# EAGLE board dspCore_rev1.3 (EAGLE 7.6.0), part 1 of 2
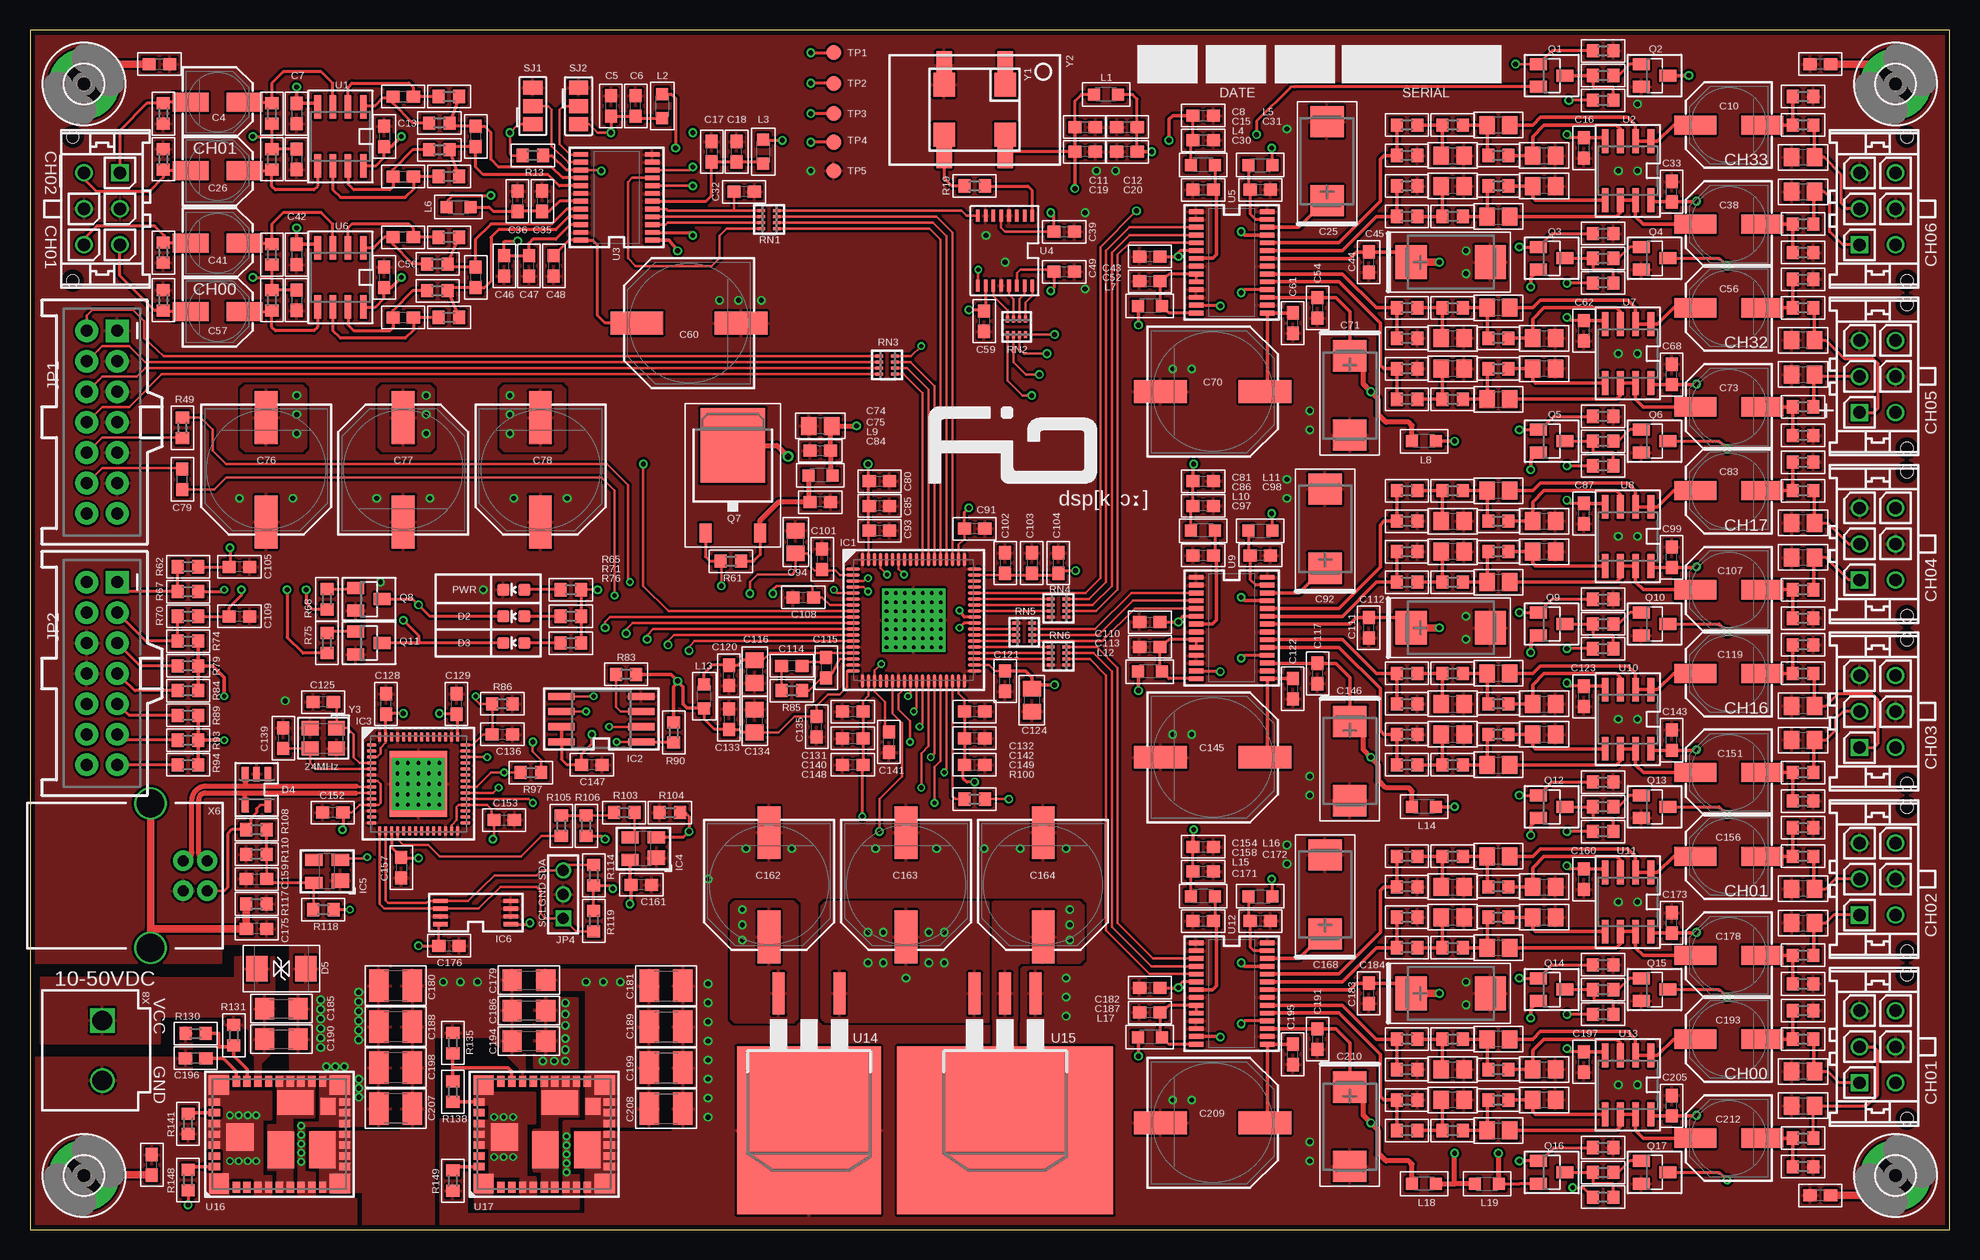
[diagram p0: board, top side]
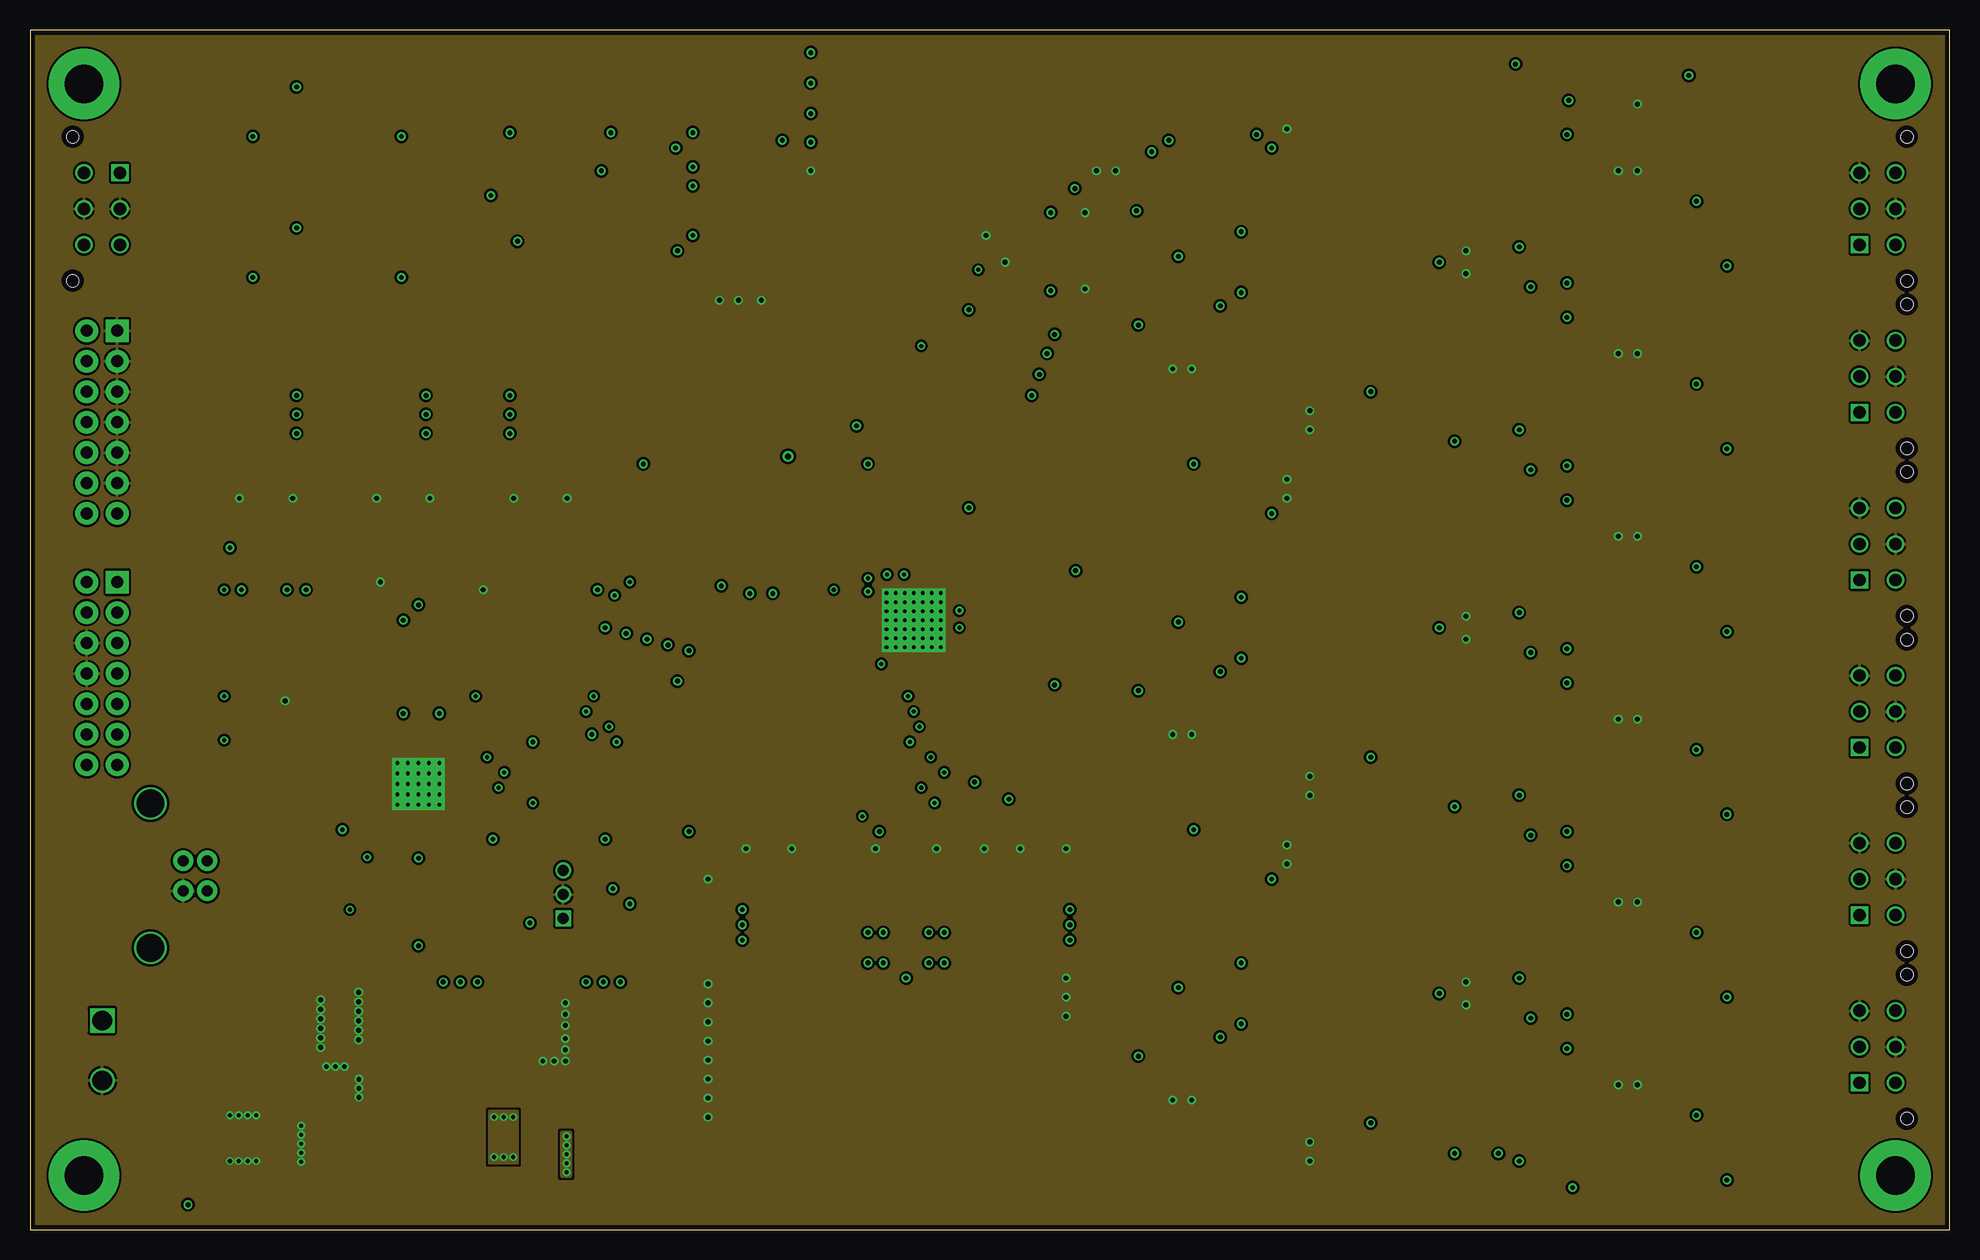
[diagram p1: board, inner layer groundplane]
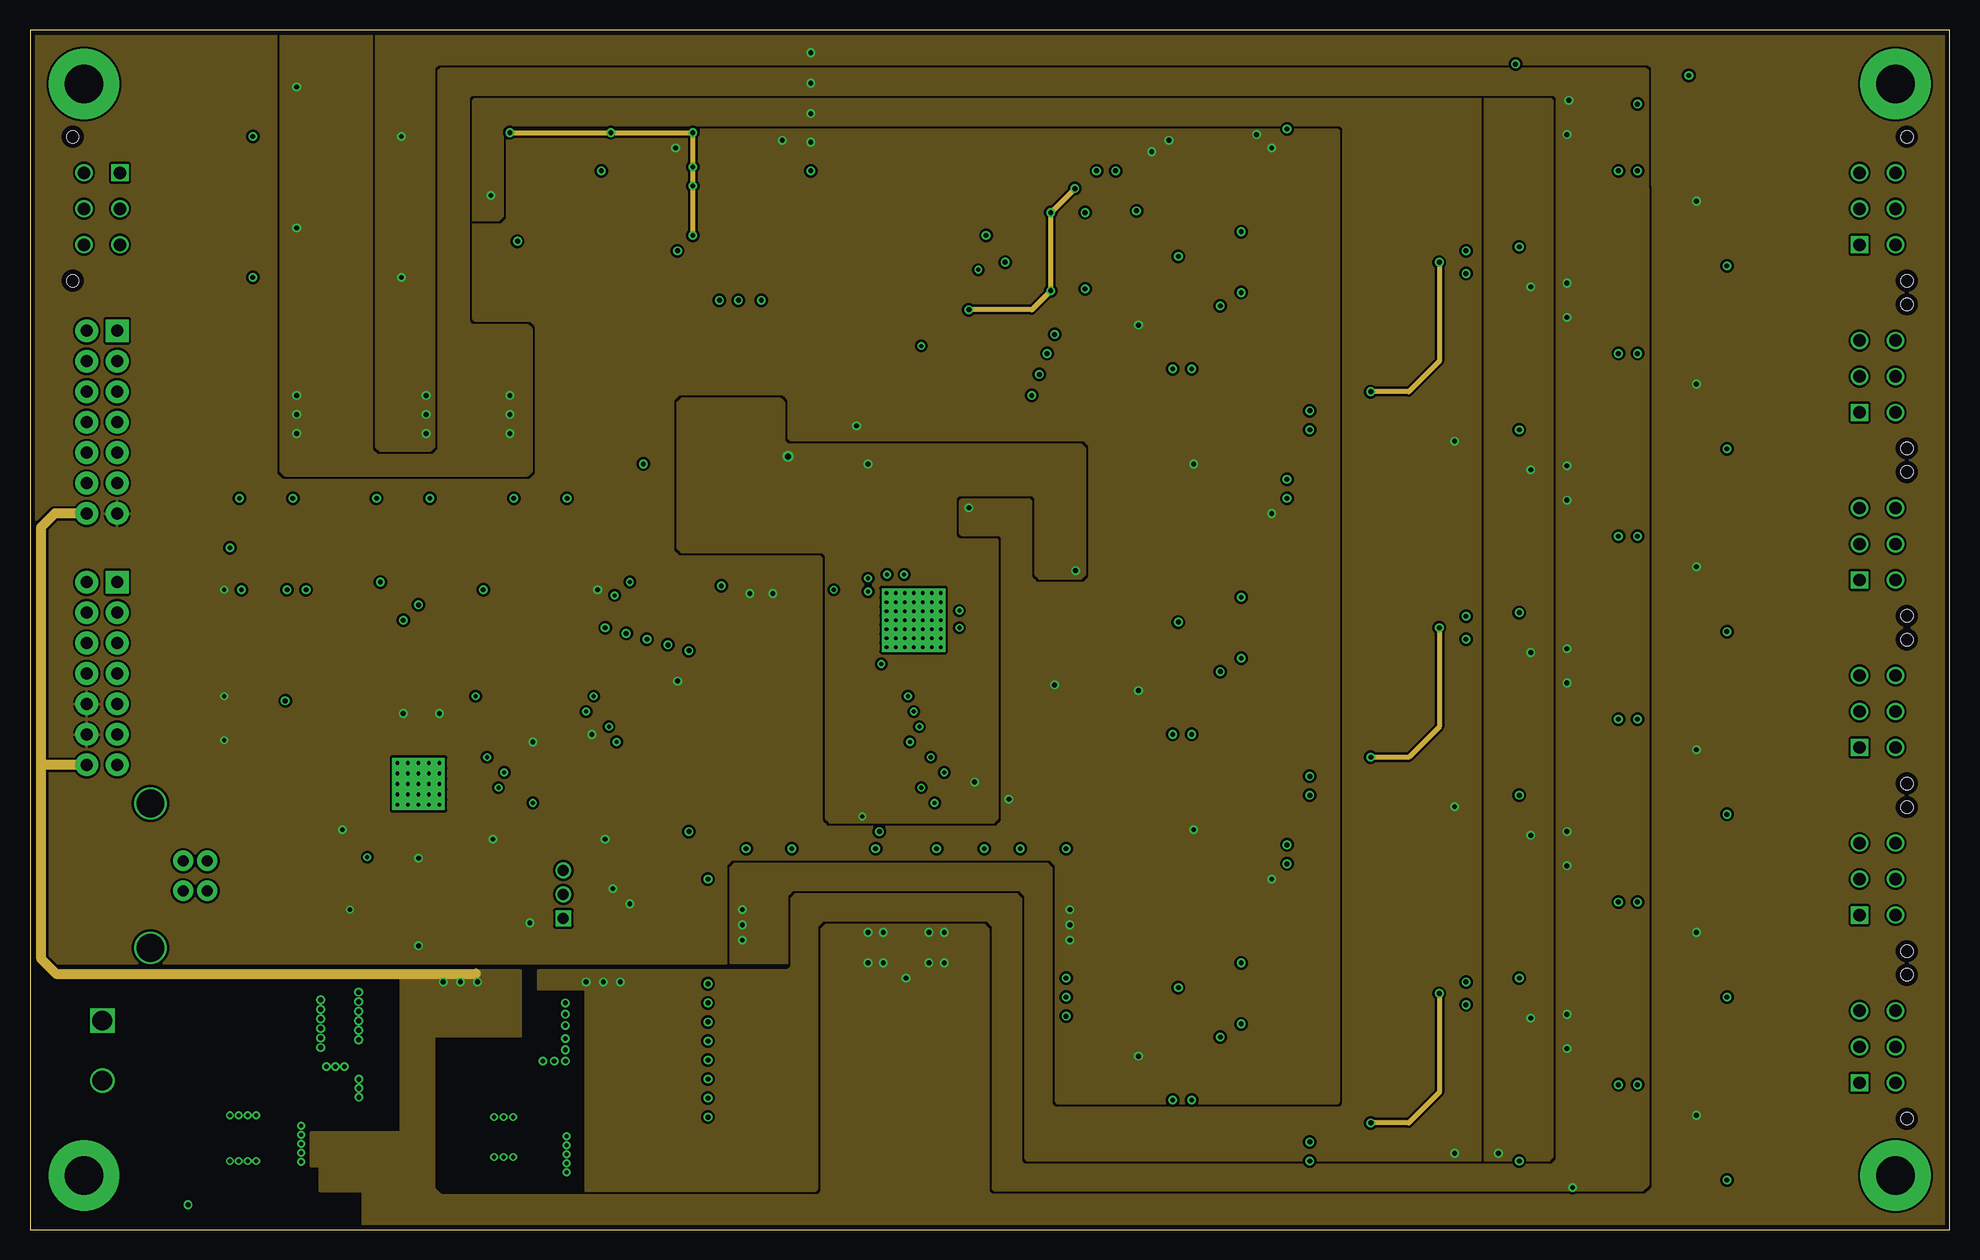
[diagram p2: board, inner layer powerplane]
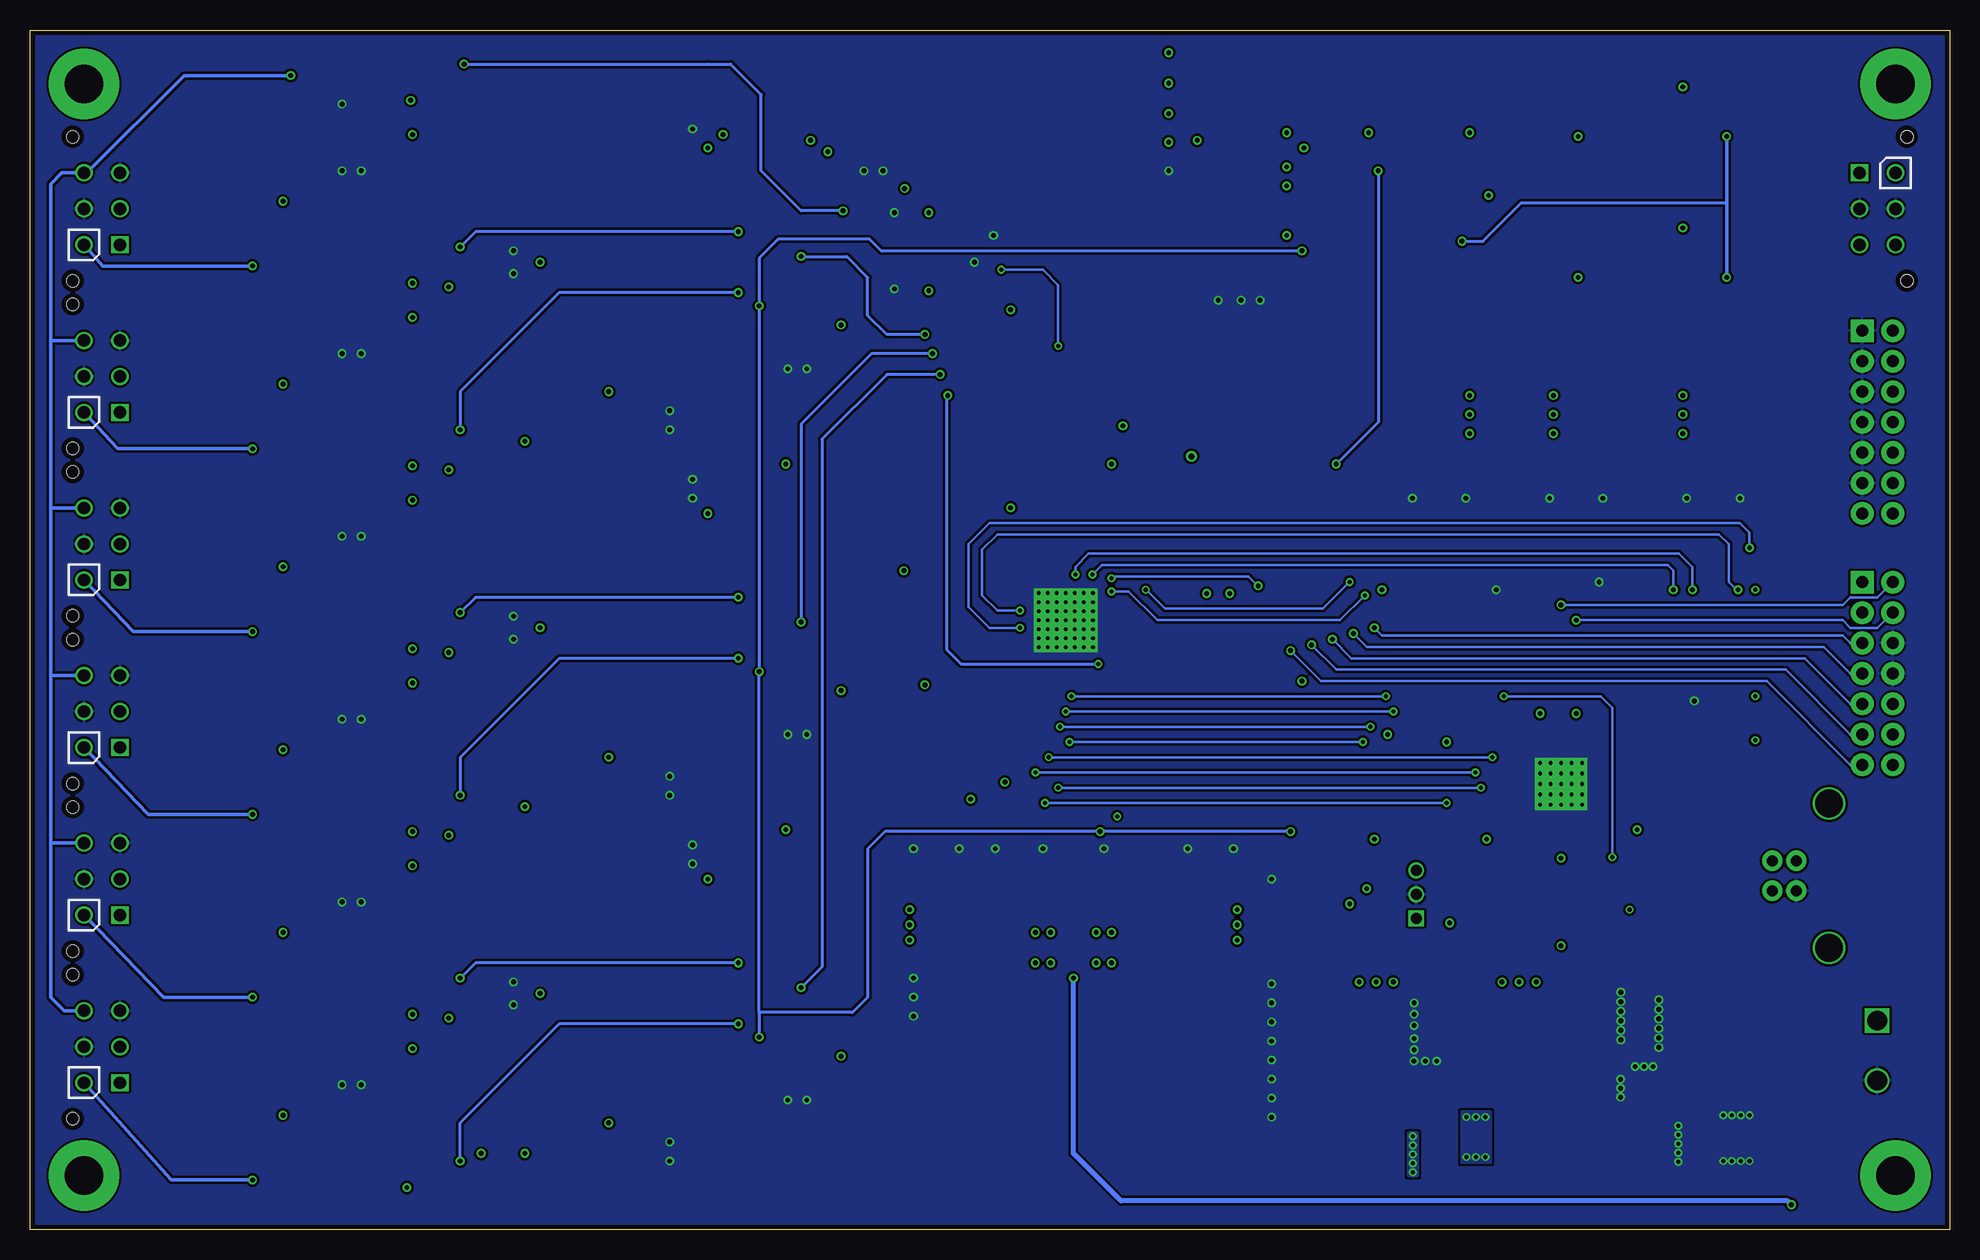
[diagram p3: board, bottom side, seen from below]

Size 160 x 100 mm. Coordinates in mm from the lower left corner, seen from the top.
Outline: 0,0 160,0 160,100 0,100 0,0
Copper layers (1+2*15+16): Top 0.035mm / dielectric 0.38mm / groundplane 0.035mm / dielectric 0.71mm / powerplane 0.035mm / dielectric 0.38mm / Bottom 0.035mm
Design rules "default": minimum track width 0.15mm, minimum drill 0.3mm, track to track 0.15mm, track to pad 0.15mm, pad to pad 0.15mm, via to via 0.15mm, smd to smd 0.15mm, copper to edge 0.4mm, drill to drill 0.2mm, minimum pad ring 0.2mm, minimum via ring 0.15mm, stop-mask expansion 0.075mm, vias tented up to drill 0mil, thermal gap 0.2mm
Net classes: 0 default: clearance 0.203 mm; 1 8V: clearance 0.203 mm; 2 50V: clearance 0.254 mm; 3 Isolate: clearance 0.762 mm; 4 isolate mount: clearance 0.508 mm

## Footprints (pad centres in the part's own frame; a part is rotated, then mirrored left to right if it is on the bottom)
C0603 = smd 1.1 x 1: 1 -0.85,0; 2 0.85,0
PANASONIC_C = smd 3 x 1.6: + 2.25,0; - -2.25,0
C0805 = smd 1.3 x 1.5: 1 -0.95,0; 2 0.95,0
PANASONIC_D = smd 3.5 x 1.6: + 2.8,0; - -2.8,0
CT7343 = smd 2.6 x 2.8: + -3.3,0; - 3.3,0
PANASONIC_G = smd 4.4 x 1.9: + 4.35,0; - -4.35,0
C1206 = smd 1.6 x 1.8: 1 -1.4,0; 2 1.4,0
C1210 = smd 1.6 x 2.7: 1 -1.4,0; 2 1.4,0
LED-0603 = smd 1 x 1: A 0,-0.877; C 0,0.877
SOT23-5L = smd 0.55 x 1.2: 1 -0.95,-1.3; 2 0,-1.3; 3 0.95,-1.3; 4 0.95,1.3; 5 -0.953,1.295
SMBJ = smd 1.78 x 2.16: A 2.04,0; C -2.03,0
3,2-PAD = drill 3.2 pad 5.842: B3,2 0,0
LFCSP-72 = smd 1.1 x 0.28: 1 -5.058,4.25; 2 -5.058,3.75; 3 -5.058,3.25; 4 -5.058,2.75; 5 -5.058,2.25; 6 -5.058,1.75; 7 -5.058,1.25; 8 -5.058,0.75; 9 -5.058,0.25; 10 -5.058,-0.25; 11 -5.058,-0.75; 12 -5.058,-1.25; 13 -5.058,-1.75; 14 -5.058,-2.25; 15 -5.058,-2.75; 16 -5.058,-3.25; 17 -5.058,-3.75; 18 -5.058,-4.25; 37 5.058,-4.25; 38 5.058,-3.75; 39 5.058,-3.25; 40 5.058,-2.75; 41 5.058,-2.25; 42 5.058,-1.75; 43 5.058,-1.25; 44 5.058,-0.75; 45 5.058,-0.25; 46 5.058,0.25; 47 5.058,0.75; 48 5.058,1.25; 49 5.058,1.75; 50 5.058,2.25; 51 5.058,2.75; 52 5.058,3.25; 53 5.058,3.75; 54 5.058,4.25 | smd 0.28 x 1.1: 19 -4.25,-5.058; 20 -3.75,-5.058; 21 -3.25,-5.058; 22 -2.75,-5.058; 23 -2.25,-5.058; 24 -1.75,-5.058; 25 -1.25,-5.058; 26 -0.75,-5.058; 27 -0.25,-5.058; 28 0.25,-5.058; 29 0.75,-5.058; 30 1.25,-5.058; 31 1.75,-5.058; 32 2.25,-5.058; 33 2.75,-5.058; 34 3.25,-5.058; 35 3.75,-5.058; 36 4.25,-5.058; 55 4.25,5.058; 56 3.75,5.058; 57 3.25,5.058; 58 2.75,5.058; 59 2.25,5.058; 60 1.75,5.058; 61 1.25,5.058; 62 0.75,5.058; 63 0.25,5.058; 64 -0.25,5.058; 65 -0.75,5.058; 66 -1.25,5.058; 67 -1.75,5.058; 68 -2.25,5.058; 69 -2.75,5.058; 70 -3.25,5.058; 71 -3.75,5.058; 72 -4.25,5.058 | drill 0.3 pad 0.754 square: P$1 -2.262,-2.262; P$2 -2.262,-1.508; P$3 -2.262,-0.754; P$4 -2.262,0; P$5 -2.262,0.754; P$6 -2.262,1.508; P$7 -2.262,2.262; P$8 -1.508,2.262; P$9 -0.754,2.262; P$10 0,2.262; P$11 0.754,2.262; P$12 1.508,2.262; P$13 2.262,2.262; P$14 2.262,1.508; P$15 2.262,0.754; P$16 1.508,0.754; P$17 1.508,1.508; P$18 0.754,1.508; P$19 0,1.508; P$20 -1.508,1.508; P$21 -0.754,1.508; P$22 -1.508,0.754; P$23 -0.754,0.754; P$24 0,0.754; P$25 0.754,0.754; P$27 2.262,0; P$28 1.508,0; P$29 0.754,0; P$30 0,0; P$31 -0.754,0; P$32 -1.508,0; P$33 -1.508,-0.754; P$34 -0.754,-0.754; P$35 0,-0.754; P$36 0.754,-0.754; P$37 2.262,-0.754; P$38 1.508,-0.754; P$39 2.262,-1.508; P$40 1.508,-1.508; P$41 0.754,-1.508; P$42 -0.754,-1.508; P$43 0,-1.508; P$44 -1.508,-1.508; P$45 -1.508,-2.262; P$46 -0.754,-2.262; P$47 0,-2.262; P$48 0.754,-2.262; P$49 1.508,-2.262; P$50 2.262,-2.262 | smd 5.25 x 5.25: P$26 0,0
SO-08M = smd 0.6 x 2.2: 1 -1.905,-3.33; 2 -0.635,-3.33; 3 0.635,-3.33; 4 1.905,-3.33; 5 1.905,3.33; 6 0.635,3.33; 7 -0.635,3.33; 8 -1.905,3.33
QFN56 = smd 0.8 x 0.28: 1 -3.915,3.25; 2 -3.915,2.75; 3 -3.915,2.25; 4 -3.915,1.75; 5 -3.915,1.25; 6 -3.915,0.75; 7 -3.915,0.25; 8 -3.915,-0.25; 9 -3.915,-0.75; 10 -3.915,-1.25; 11 -3.915,-1.75; 12 -3.915,-2.25; 13 -3.915,-2.75; 14 -3.915,-3.25; 29 3.915,-3.25; 30 3.915,-2.75; 31 3.915,-2.25; 32 3.915,-1.75; 33 3.915,-1.25; 34 3.915,-0.75; 35 3.915,-0.25; 36 3.915,0.25; 37 3.915,0.75; 38 3.915,1.25; 39 3.915,1.75; 40 3.915,2.25; 41 3.915,2.75; 42 3.915,3.25 | smd 0.28 x 0.8: 15 -3.25,-3.915; 16 -2.75,-3.915; 17 -2.25,-3.915; 18 -1.75,-3.915; 19 -1.25,-3.915; 20 -0.75,-3.915; 21 -0.25,-3.915; 22 0.25,-3.915; 23 0.75,-3.915; 24 1.25,-3.915; 25 1.75,-3.915; 26 2.25,-3.915; 27 2.75,-3.915; 28 3.25,-3.915; 43 3.25,3.915; 44 2.75,3.915; 45 2.25,3.915; 46 1.75,3.915; 47 1.25,3.915; 48 0.75,3.915; 49 0.25,3.915; 50 -0.25,3.915; 51 -0.75,3.915; 52 -1.25,3.915; 53 -1.75,3.915; 54 -2.25,3.915; 55 -2.75,3.915; 56 -3.25,3.915 | smd 4.8 x 5.5: EPAD 0,0 | drill 0.3 pad 0.873 square: P$1 -1.746,1.746; P$2 -0.873,1.746; P$3 0,1.746; P$4 0.873,1.746; P$5 1.746,1.746; P$6 0,0.873; P$7 1.746,0; P$8 0.873,0; P$9 -0.873,0; P$10 -1.746,0; P$11 -1.746,0.873; P$12 -0.873,0.873; P$13 0,0; P$14 0.873,0.873; P$15 1.746,0.873; P$16 1.746,-1.746; P$17 0.873,-1.746; P$18 0,-1.746; P$19 -0.873,-0.873; P$20 -1.746,-1.746; P$21 -1.746,-0.873; P$22 -0.873,-1.746; P$23 0,-0.873; P$24 0.873,-0.873; P$25 1.746,-0.873
SOT143 = smd 1.2 x 1.44: 1 -0.75,-1.1 | smd 1 x 1.44: 2 0.95,-1.1; 3 0.95,1.1; 4 -0.95,1.1
TSSOP8 = smd 0.35 x 1.2: 1 -0.975,-2.925; 2 -0.325,-2.925; 3 0.325,-2.925; 4 0.975,-2.925; 5 0.975,2.925; 6 0.325,2.925; 7 -0.325,2.925; 8 -0.975,2.925
2X7-SHROUDED_LOCK = drill 1 pad 1.88 square: 1 -7.62,1.27 | drill 1 pad 1.88: 2 -7.62,-1.27; 3 -5.08,1.27; 4 -5.08,-1.27; 5 -2.54,1.27; 6 -2.54,-1.27; 7 0,1.27; 8 0,-1.27; 9 2.54,1.27; 10 2.54,-1.27; 11 5.08,1.27; 12 5.08,-1.27; 13 7.62,1.27; 14 7.62,-1.27
1X03M = drill 0.914 square: 1 -2,0 | drill 0.914: 2 0,0; 3 2,0
L2012C = smd 1 x 1: 1 -1,0; 2 1,0
SOT-23 = smd 1 x 1.4: 1 -0.95,-1.1; 2 0.95,-1.1; 3 0,1.1
SOT-23' = smd 1 x 1.4: B -0.95,-1.1; C 0,1.1; E 0.95,-1.1
TO252 = smd 1 x 1.6: 1 -2.28,-4.8; 3 2.28,-4.8 | smd 5.4 x 6.2: 2 0,2.5
R0603 = smd 1 x 1.1: 1 -0.85,0; 2 0.85,0
741-8 = smd 0.25 x 0.61: 1 -0.75,-0.65; 2 -0.25,-0.65; 3 0.25,-0.65; 4 0.75,-0.65; 5 0.75,0.65; 6 0.25,0.65; 7 -0.25,0.65; 8 -0.75,0.65
SJ_2 = smd 1.168 x 1.6: 1 -1.524,0; 2 0,0; 3 1.524,0
B1,27 = smd 1.27 x 1.27: TP 0,0
SOIC8 = smd 0.559 x 1.981: 1 -1.905,-2.464; 2 -0.635,-2.464; 3 0.635,-2.464; 4 1.905,-2.464; 5 1.905,2.464; 6 0.635,2.464; 7 -0.635,2.464; 8 -1.905,2.464
TSSOP-24 = smd 0.4 x 1.2: 1 -3.575,-2.97; 2 -2.925,-2.97; 3 -2.275,-2.97; 4 -1.625,-2.97; 5 -0.975,-2.97; 6 -0.325,-2.97; 7 0.325,-2.97; 8 0.975,-2.97; 9 1.625,-2.97; 10 2.275,-2.97; 11 2.925,-2.97; 12 3.575,-2.97; 13 3.575,2.97; 14 2.925,2.97; 15 2.275,2.97; 16 1.625,2.97; 17 0.975,2.97; 18 0.325,2.97; 19 -0.325,2.97; 20 -0.975,2.97; 21 -1.625,2.97; 22 -2.275,2.97; 23 -2.925,2.97; 24 -3.575,2.97
TSSOP16 = smd 0.305 x 0.991: 1 -2.275,-2.918; 2 -1.625,-2.918; 3 -0.975,-2.918; 4 -0.325,-2.918; 5 0.325,-2.918; 6 0.975,-2.918; 7 1.625,-2.918; 8 2.275,-2.918; 9 2.275,2.918; 10 1.625,2.918; 11 0.975,2.918; 12 0.325,2.918; 13 -0.325,2.918; 14 -0.975,2.918; 15 -1.625,2.918; 16 -2.275,2.918
TSSOP-28 = smd 0.4 x 1.2: 1 -4.21,-2.97; 2 -3.56,-2.97; 3 -2.91,-2.97; 4 -2.26,-2.97; 5 -1.61,-2.97; 6 -0.96,-2.97; 7 -0.31,-2.97; 8 0.34,-2.97; 9 0.99,-2.97; 10 1.64,-2.97; 11 2.29,-2.97; 12 2.94,-2.97; 13 3.59,-2.97; 14 4.24,-2.97; 15 4.24,2.97; 16 3.59,2.97; 17 2.94,2.97; 18 2.29,2.97; 19 1.64,2.97; 20 0.99,2.97; 21 0.34,2.97; 22 -0.31,2.97; 23 -0.96,2.97; 24 -1.61,2.97; 25 -2.26,2.97; 26 -2.91,2.97; 27 -3.56,2.97; 28 -4.21,2.97
TO263-2 = smd 1.016 x 3.504: 1 -2.54,-8.89; 3 2.54,-8.89 | smd 12 x 14: 2 0,2.54
TO263-3 = smd 1.016 x 3.504: 1 -2.54,-8.89; 2 0,-8.89; 3 2.54,-8.89 | smd 18 x 14: 4 0,2.54
B1QFN-41 = smd 1.702 x 1.6: 1 -4.1,5.05 | smd 0.94 x 0.61: 2 -4.42,3.6; 3 -4.42,2.7; 4 -4.42,1.8; 5 -4.42,0.9; 6 -4.42,0; 7 -4.42,-0.9; 8 -4.42,-1.8; 9 -4.42,-2.7; 10 -4.42,-3.6; 20 4.42,-3.6; 21 4.42,-2.7; 22 4.42,-1.8; 23 4.42,-0.9; 24 4.42,0; 25 4.42,0.9; 26 4.42,1.8; 27 4.42,2.7; 28 4.42,3.6 | smd 1.6 x 1.702: 11 -4.1,-5.05; 19 4.1,-5.05; 29 4.1,5.05 | smd 0.61 x 0.94: 12 -2.7,-5.425; 13 -1.8,-5.425; 14 -0.9,-5.425; 15 0,-5.425; 16 0.9,-5.425; 17 1.8,-5.425; 18 2.7,-5.425; 30 2.7,5.425; 31 1.8,5.425; 32 0.9,5.425; 33 0,5.425; 34 -0.9,5.425; 35 -1.8,5.425; 36 -2.7,5.425 | smd 2.311 x 2.261: 37 -0.22,3.3 | smd 3.099 x 2.21: 38 -1.3,-0.11; 39 -1.3,-3.59 | smd 1.397 x 1.245: 40 2.33,-4.06 | smd 2.032 x 3.048: 41 2.65,-1.32
B1QFN-41' = smd 1.6 x 1.702: 1 -4.1,5.05; 11 -4.1,-5.05; 19 4.1,-5.05; 29 4.1,5.05 | smd 0.94 x 0.61: 2 -4.42,3.6; 3 -4.42,2.7; 4 -4.42,1.8; 5 -4.42,0.9; 6 -4.42,0; 7 -4.42,-0.9; 8 -4.42,-1.8; 9 -4.42,-2.7; 10 -4.42,-3.6; 20 4.42,-3.6; 21 4.42,-2.7; 22 4.42,-1.8; 23 4.42,-0.9; 24 4.42,0; 25 4.42,0.9; 26 4.42,1.8; 27 4.42,2.7; 28 4.42,3.6 | smd 0.61 x 0.94: 12 -2.7,-5.425; 13 -1.8,-5.425; 14 -0.9,-5.425; 15 0,-5.425; 16 0.9,-5.425; 17 1.8,-5.425; 18 2.7,-5.425; 30 2.7,5.425; 31 1.8,5.425; 32 0.9,5.425; 33 0,5.425; 34 -0.9,5.425; 35 -1.8,5.425; 36 -2.7,5.425 | smd 2.311 x 2.261: 37 -0.22,3.3 | smd 3.099 x 2.21: 38 -1.3,-0.11; 39 -1.3,-3.59 | smd 1.397 x 1.245: 40 2.33,-4.06 | smd 2.032 x 3.048: 41 2.65,-1.32
43045-0612 = drill 1.02 square: P$1 3,-1.5 | drill 1.02: P$2 0,-1.5; P$3 -3,-1.5; P$4 3,1.5; P$5 0,1.5; P$6 -3,1.5 | hole 1.02: 6,2.44; -6,2.44
USB-B-H = drill 0.92 pad 1.676: D+ 0,1.25; D- 2,1.25; GND 0,-1.25; VBUS 2,-1.25 | drill 2.3: S1 -2.71,-6.02; S2 -2.71,6.02
B02P-NV = drill 1.65 square: 1 -2.5,0 | drill 1.65: 2 2.5,0
CRYSTAL-SMD-7X5 = smd 1.8 x 2: 1 -2.54,-2.108; 2 2.54,-2.108; 3 2.54,2.092; 4 -2.54,2.092
CRYSTAL-SMD-9X14 = smd 1.3 x 2.3: 1 -2.54,-3.714; 2 2.54,-3.714; 3 2.54,3.714; 4 -2.54,3.714
3.2X2.5MM = smd 1.4 x 1.2: 1 -1.1,-0.85; 2 1.1,-0.85; 3 1.1,0.85; 4 -1.1,0.85

## Placement (x,y rotation side)
C1  0.01u  [C0603]  10.79,97.16 0 top
C2  0.01u  [C0603]  149.22,97.16 180 top
C3  470p  [C0603]  31.11,94.46 0 top
C4  10u  [PANASONIC_C]  15.64,93.98 0 top
C5  0.01u  [C0603]  48.42,93.66 270 top
C6  1u  [C0603]  50.48,93.66 90 top
C7  0.10u  [C0603]  22.23,93.03 270 top
C8  1u  [C0603]  97.79,92.87 0 top
C9  0.018u  [C0805]  122.4,92.08 180 top
C10  47u  [PANASONIC_D]  141.6,92.08 180 top
C11  0.10u  [C0603]  87.95,91.92 0 top
C12  0.10u  [C0603]  91.44,91.92 0 top
C13  0.10u  [C0603]  29.53,91.12 270 top
C14  2700p  [C0603]  37.15,91.12 270 top
C15  0.10u  [C0603]  97.79,90.81 180 top
C16  0.10u  [C0603]  129.54,90.17 90 top
C17  0.01u  [C0603]  56.83,89.85 270 top
C18  1u  [C0603]  58.9,89.85 90 top
C19  0.01u  [C0603]  87.95,89.85 180 top
C20  1u  [C0603]  91.44,89.85 180 top
C21  0.015u  [C0805]  118.59,89.53 0 top
C22  2200p  [C0805]  126.21,89.53 0 top
C23  6800p  [C0805]  147.8,89.38 180 top
C24  0.01u  [C0603]  22.23,89.22 270 top
C25  33u  [CT7343]  108.11,89.06 90 top
C26  10u  [PANASONIC_C]  15.64,88.27 0 top
C27  470p  [C0603]  31.11,87.79 0 top
C28  0.015u  [C0805]  118.59,87 180 top
C29  2200p  [C0805]  126.21,87 180 top
C30  0.01u  [C0603]  97.79,86.68 0 top
C31  0.01u  [C0603]  102.55,86.68 180 top
C32  15p  [C0603]  59.53,86.52 180 top
C33  0.10u  [C0603]  136.84,86.52 90 top
C34  6800p  [C0805]  147.8,86.52 0 top
C35  0.01u  [C0603]  42.7,85.73 270 top
C36  1u  [C0603]  40.64,85.72 270 top
C37  0.018u  [C0805]  122.4,84.45 0 top
C38  47u  [PANASONIC_D]  141.6,83.82 180 top
C39  1u  [C0603]  86.2,83.19 0 top
C40  470p  [C0603]  31.11,82.71 180 top
C41  10u  [PANASONIC_C]  15.64,82.23 0 top
C42  0.10u  [C0603]  22.23,81.28 270 top
C43  15p  [C0603]  93.34,81.12 0 top
C44  0.01u  [C0603]  111.6,80.64 90 top
C45  33u  [CT7343]  118.43,80.64 0 top
C46  1u  [C0603]  39.53,80.33 90 top
C47  0.01u  [C0603]  41.59,80.33 90 top
C48  0.01u  [C0603]  43.66,80.33 270 top
C49  1u  [C0603]  86.2,79.85 0 top
C50  0.10u  [C0603]  29.53,79.38 270 top
C51  2700p  [C0603]  37.15,79.38 270 top
C52  0.01u  [C0603]  93.34,79.06 0 top
C53  0.01u  [C0603]  22.23,77.47 270 top
C54  0.01u  [C0603]  107.31,76.83 270 top
C55  0.018u  [C0805]  122.4,76.83 180 top
C56  47u  [PANASONIC_D]  141.6,76.83 180 top
C57  10u  [PANASONIC_C]  15.64,76.52 0 top
C58  470p  [C0603]  31.11,76.04 0 top
C59  1u  [C0603]  79.53,75.72 270 top
C60  100u  [PANASONIC_G]  54.93,75.56 180 top
C61  0.01u  [C0603]  105.25,75.56 90 top
C62  0.10u  [C0603]  129.54,74.93 90 top
C63  0.015u  [C0805]  118.59,74.3 0 top
C64  2200p  [C0805]  126.21,74.3 0 top
C65  6800p  [C0805]  147.8,74.14 180 top
C66  0.015u  [C0805]  118.59,71.75 180 top
C67  2200p  [C0805]  126.21,71.75 180 top
C68  0.10u  [C0603]  136.84,71.28 90 top
C69  6800p  [C0805]  147.8,71.28 0 top
C70  100u  [PANASONIC_G]  98.58,69.85 0 top
C71  33u  [CT7343]  110.01,69.53 270 top
C72  0.018u  [C0805]  122.4,69.22 0 top
C73  47u  [PANASONIC_D]  141.6,68.58 180 top
C74  10u  [C0805]  65.88,66.99 180 top
C75  0.10u  [C0603]  65.88,64.93 0 top
C76  100u  [PANASONIC_G]  19.69,63.34 270 top
C77  100u  [PANASONIC_G]  31.11,63.34 90 top
C78  100u  [PANASONIC_G]  42.55,63.34 270 top
C79  0.01u  [C0603]  12.7,62.55 90 top
C80  1u  [C0603]  70.8,62.39 0 top
C81  1u  [C0603]  97.79,62.39 0 top
C82  0.018u  [C0805]  122.4,61.59 180 top
C83  47u  [PANASONIC_D]  141.6,61.59 180 top
C84  0.10u  [C0603]  65.88,60.64 180 top
C85  0.10u  [C0603]  70.8,60.33 180 top
C86  0.10u  [C0603]  97.79,60.33 180 top
C87  0.10u  [C0603]  129.54,59.69 90 top
C88  0.015u  [C0805]  118.59,59.05 0 top
C89  2200p  [C0805]  126.21,59.05 0 top
C90  6800p  [C0805]  147.8,58.9 180 top
C91  0.10u  [C0603]  78.74,58.42 180 top
C92  33u  [CT7343]  107.95,58.42 90 top
C93  0.01u  [C0603]  70.8,58.26 180 top
C94  10u  [C0805]  63.82,57.31 90 top
C95  0.015u  [C0805]  118.59,56.52 180 top
C96  2200p  [C0805]  126.21,56.52 180 top
C97  0.01u  [C0603]  97.79,56.2 0 top
C98  0.01u  [C0603]  102.55,56.2 180 top
C99  0.10u  [C0603]  136.84,56.04 90 top
C100  6800p  [C0805]  147.8,56.04 0 top
C101  0.10u  [C0603]  66.04,55.88 270 top
C102  0.01u  [C0603]  81.28,55.56 270 top
C103  0.10u  [C0603]  83.5,55.56 270 top
C104  1u  [C0603]  85.72,55.56 90 top
C105  0.01u  [C0603]  17.46,55.24 180 top
C106  0.018u  [C0805]  122.4,53.98 0 top
C107  47u  [PANASONIC_D]  141.6,53.34 180 top
C108  0.10u  [C0603]  64.45,52.7 0 top
C109  0.01u  [C0603]  17.46,51.12 180 top
C110  15p  [C0603]  93.34,50.64 0 top
C111  0.01u  [C0603]  111.6,50.16 90 top
C112  33u  [CT7343]  118.43,50.16 0 top
C113  0.01u  [C0603]  93.34,48.58 0 top
C114  5600p  [C0603]  63.5,46.99 180 top
C115  150p  [C0603]  66.36,46.83 270 top
C116  10u  [C0805]  60.4,46.51 270 top
C117  0.01u  [C0603]  107.31,46.35 270 top
C118  0.018u  [C0805]  122.4,46.35 180 top
C119  47u  [PANASONIC_D]  141.6,46.35 180 top
C120  0.10u  [C0603]  58.26,46.2 90 top
C121  0.10u  [C0603]  81.28,45.72 90 top
C122  0.01u  [C0603]  105.25,45.09 90 top
C123  0.10u  [C0603]  129.54,44.45 90 top
C124  10u  [C0805]  83.5,44.13 270 top
C125  15p  [C0603]  24.45,43.97 180 top
C126  0.015u  [C0805]  118.59,43.81 0 top
C127  2200p  [C0805]  126.21,43.81 0 top
C128  0.10u  [C0603]  29.69,43.81 90 top
C129  0.10u  [C0603]  35.56,43.81 90 top
C130  6800p  [C0805]  147.8,43.66 180 top
C131  0.01u  [C0603]  68.58,43.18 0 top
C132  0.01u  [C0603]  78.74,43.18 180 top
C133  0.10u  [C0603]  58.26,42.55 270 top
C134  10u  [C0805]  60.4,42.39 90 top
C135  0.10u  [C0603]  65.56,41.91 90 top
C136  0.10u  [C0603]  39.37,41.27 180 top
C137  0.015u  [C0805]  118.59,41.27 180 top
C138  2200p  [C0805]  126.21,41.27 180 top
C139  15p  [C0603]  21.11,40.96 270 top
C140  0.10u  [C0603]  68.58,40.96 0 top
C141  15p  [C0603]  71.6,40.64 90 top
C142  0.10u  [C0603]  78.74,40.96 180 top
C143  0.10u  [C0603]  136.84,40.8 90 top
C144  6800p  [C0805]  147.8,40.8 0 top
C145  100u  [PANASONIC_G]  98.58,39.37 0 top
C146  33u  [CT7343]  110.01,39.05 270 top
C147  0.10u  [C0603]  46.83,38.73 180 top
C148  1u  [C0603]  68.58,38.73 180 top
C149  1u  [C0603]  78.74,38.73 0 top
C150  0.018u  [C0805]  122.4,38.73 0 top
C151  47u  [PANASONIC_D]  141.6,38.1 180 top
C152  0.10u  [C0603]  25.24,34.77 180 top
C153  0.10u  [C0603]  39.53,34.13 0 top
C154  1u  [C0603]  97.79,31.91 0 top
C155  0.018u  [C0805]  122.4,31.11 180 top
C156  47u  [PANASONIC_D]  141.61,31.11 180 top
C157  0.10u  [C0603]  30.96,30.16 270 top
C158  0.10u  [C0603]  97.79,29.84 180 top
C159  0.10u  [C0603]  18.89,29.21 0 top
C160  0.10u  [C0603]  129.54,29.21 90 top
C161  0.10u  [C0603]  50.96,28.73 180 top
C162  100u  [PANASONIC_G]  61.59,28.73 270 top
C163  100u  [PANASONIC_G]  73.03,28.73 270 top
C164  100u  [PANASONIC_G]  84.45,28.73 270 top
C165  0.015u  [C0805]  118.59,28.57 0 top
C166  2200p  [C0805]  126.21,28.57 0 top
C167  6800p  [C0805]  147.8,28.42 180 top
C168  33u  [CT7343]  107.95,27.94 90 top
C169  0.015u  [C0805]  118.59,26.04 180 top
C170  2200p  [C0805]  126.21,26.04 180 top
C171  0.01u  [C0603]  97.79,25.72 0 top
C172  0.01u  [C0603]  102.55,25.72 180 top
C173  0.10u  [C0603]  136.84,25.56 90 top
C174  6800p  [C0805]  147.8,25.56 0 top
C175  0.10u  [C0603]  18.89,25.08 180 top
C176  0.10u  [C0603]  34.92,23.65 0 top
C177  0.018u  [C0805]  122.4,23.5 0 top
C178  47u  [PANASONIC_D]  141.6,22.86 180 top
C179  4.7u  [C1206]  41.59,20.8 0 top
C180  22u  [C1210]  30.48,20.32 180 top
C181  22u  [C1210]  53.02,20.32 0 top
C182  15p  [C0603]  93.34,20.16 0 top
C183  0.01u  [C0603]  111.6,19.68 90 top
C184  33u  [CT7343]  118.43,19.68 0 top
C185  4.7u  [C1206]  20.95,18.41 0 top
C186  4.7u  [C1206]  41.59,18.26 0 top
C187  0.01u  [C0603]  93.34,18.1 0 top
C188  22u  [C1210]  30.48,16.91 180 top
C189  22u  [C1210]  53.02,16.91 0 top
C190  4.7u  [C1206]  20.95,15.88 0 top
C191  0.01u  [C0603]  107.31,15.88 270 top
C192  0.018u  [C0805]  122.4,15.88 180 top
C193  47u  [PANASONIC_D]  141.6,15.88 180 top
C194  4.7u  [C1206]  41.59,15.72 0 top
C195  0.01u  [C0603]  105.25,14.61 90 top
C196  0.22u  [C0603]  13.81,14.29 180 top
C197  0.10u  [C0603]  129.54,13.97 90 top
C198  22u  [C1210]  30.48,13.49 180 top
C199  22u  [C1210]  53.02,13.49 0 top
C200  0.015u  [C0805]  118.59,13.34 0 top
C201  2200p  [C0805]  126.21,13.34 0 top
C202  6800p  [C0805]  147.8,13.18 180 top
C203  0.015u  [C0805]  118.59,10.79 180 top
C204  2200p  [C0805]  126.21,10.79 180 top
C205  0.10u  [C0603]  136.84,10.32 90 top
C206  6800p  [C0805]  147.8,10.32 0 top
C207  22u  [C1210]  30.48,10.08 180 top
C208  22u  [C1210]  53.02,10.08 0 top
C209  100u  [PANASONIC_G]  98.58,8.89 0 top
C210  33u  [CT7343]  110.01,8.57 270 top
C211  0.018u  [C0805]  122.4,8.26 0 top
C212  47u  [PANASONIC_D]  141.6,7.62 180 top
C213  0.01u  [C0603]  10.16,5.4 90 top
C214  0.01u  [C0603]  149.22,2.85 180 top
D1  GREEN  [LED-0603]  40.32,53.34 90 top
D2  GREEN  [LED-0603]  40.32,51.12 90 top
D3  GREEN  [LED-0603]  40.32,48.9 90 top
D4  WE-TVS_824011  [SOT23-5L]  18.89,36.67 180 top
D5  SMBJ51CA  [SMBJ]  20.95,21.75 0 top
H1  DNP  [3,2-PAD]  4.5,95.5 0 top
H2  DNP  [3,2-PAD]  155.5,95.5 0 top
H3  DNP  [3,2-PAD]  4.5,4.5 180 top
H4  DNP  [3,2-PAD]  155.5,4.5 0 top
IC1  ADAU1452  [LFCSP-72]  73.66,50.8 0 top
IC2  25AA1024  [SO-08M]  47.62,42.55 90 top
IC3  CY7C68013A-56LTXC  [QFN56]  32.38,37.15 0 top
IC4  ADM811  [SOT143]  51.12,31.75 90 top
IC5  ADM811  [SOT143]  24.77,29.84 90 top
IC6  24AA256ST  [TSSOP8]  37.15,26.43 90 top
JP1  M07X2  [2X7-SHROUDED_LOCK]  6,67.31 270 top
JP2  M07X2  [2X7-SHROUDED_LOCK]  6,46.35 270 top
JP4  DNP  [1X03M]  44.45,27.94 90 top
L1  600R  [L2012C]  89.69,94.61 180 top
L2  600R  [L2012C]  52.7,93.66 270 top
L3  600R  [L2012C]  61.12,89.85 270 top
L4  600R  [L2012C]  97.79,88.74 180 top
L5  600R  [L2012C]  102.55,88.74 0 top
L6  600R  [L2012C]  35.72,85.25 0 top
L7  600R  [L2012C]  93.34,76.99 180 top
L8  600R  [L2012C]  116.2,65.72 180 top
L9  600R  [L2012C]  65.88,62.87 180 top
L10  600R  [L2012C]  97.79,58.26 180 top
L11  600R  [L2012C]  102.55,58.26 0 top
L12  600R  [L2012C]  93.34,46.51 180 top
L13  600R  [L2012C]  56.2,44.45 90 top
L14  600R  [L2012C]  116.2,35.24 180 top
L15  600R  [L2012C]  97.79,27.78 180 top
L16  600R  [L2012C]  102.55,27.78 0 top
L17  600R  [L2012C]  93.34,16.03 180 top
L18  600R  [L2012C]  116.2,3.81 180 top
L19  600R  [L2012C]  121.44,3.81 0 top
Q1  MMUN2111LT1  [SOT-23]  126.84,96.2 270 top
Q2  2SC3326  [SOT-23']  135.41,96.2 270 top
Q3  MMUN2111LT1  [SOT-23]  126.84,80.96 270 top
Q4  2SC3326  [SOT-23']  135.41,80.96 270 top
Q5  MMUN2111LT1  [SOT-23]  126.84,65.72 270 top
Q6  2SC3326  [SOT-23']  135.41,65.72 270 top
Q7  STD2805T4  [TO252]  58.58,62.87 0 top
Q8  MMBT2222A  [SOT-23']  28.26,52.55 270 top
Q9  MMUN2111LT1  [SOT-23]  126.84,50.48 270 top
Q10  2SC3326  [SOT-23']  135.41,50.48 270 top
Q11  MMBT2222A  [SOT-23']  28.26,48.9 270 top
Q12  MMUN2111LT1  [SOT-23]  126.84,35.24 270 top
Q13  2SC3326  [SOT-23']  135.41,35.24 270 top
Q14  MMUN2111LT1  [SOT-23]  126.84,20 270 top
Q15  2SC3326  [SOT-23']  135.41,20 270 top
Q16  MMUN2111LT1  [SOT-23]  126.84,4.76 270 top
Q17  2SC3326  [SOT-23']  135.41,4.76 270 top
R1  5k  [R0603]  131.13,98.27 180 top
R2  2k  [R0603]  131.13,96.2 0 top
R3  634R  [R0603]  34.92,94.46 0 top
R4  100k  [R0603]  147.8,94.46 180 top
R5  10k  [R0603]  131.13,94.14 0 top
R6  100k  [R0603]  11.11,93.03 90 top
R7  10k  [R0603]  20.16,93.03 90 top
R8  91R  [R0603]  34.13,92.23 0 top
R9  196R  [R0603]  114.78,92.08 180 top
R10  681R  [R0603]  118.59,92.08 180 top
R11  316R  [R0603]  147.8,92.08 180 top
R12  91R  [R0603]  34.13,90.01 0 top
R13  10k  [R0603]  41.91,89.53 180 top
R14  100k  [R0603]  114.78,89.53 0 top
R15  464R  [R0603]  122.4,89.53 180 top
R16  100k  [R0603]  11.11,89.22 90 top
R17  10k  [R0603]  20.16,89.22 90 top
R18  634R  [R0603]  34.92,87.79 0 top
R19  33R  [R0603]  78.74,87 180 top
R20  100k  [R0603]  114.78,87 180 top
R21  464R  [R0603]  122.4,87 180 top
R22  196R  [R0603]  114.78,84.45 180 top
R23  681R  [R0603]  118.59,84.45 180 top
R24  316R  [R0603]  147.8,83.82 180 top
R25  5k  [R0603]  131.13,83.03 180 top
R26  634R  [R0603]  34.92,82.71 0 top
R27  100k  [R0603]  147.8,81.44 0 top
R28  100k  [R0603]  11.11,81.44 270 top
R29  10k  [R0603]  20.16,81.28 270 top
R30  2k  [R0603]  131.13,80.96 0 top
R31  91R  [R0603]  33.97,80.49 0 top
R32  100k  [R0603]  147.8,79.22 180 top
R33  10k  [R0603]  131.13,78.9 0 top
R34  91R  [R0603]  33.97,78.26 0 top
R35  100k  [R0603]  11.11,77.47 270 top
R36  10k  [R0603]  20.16,77.47 270 top
R37  196R  [R0603]  114.78,76.83 180 top
R38  681R  [R0603]  118.59,76.83 180 top
R39  316R  [R0603]  147.8,76.83 180 top
R40  634R  [R0603]  34.92,76.04 0 top
R41  100k  [R0603]  114.78,74.3 0 top
R42  464R  [R0603]  122.4,74.3 180 top
R43  100k  [R0603]  114.78,71.75 180 top
R44  464R  [R0603]  122.4,71.75 180 top
R45  196R  [R0603]  114.78,69.22 180 top
R46  681R  [R0603]  118.59,69.22 180 top
R47  316R  [R0603]  147.8,68.58 180 top
R48  5k  [R0603]  131.13,67.79 180 top
R49  33R  [R0603]  12.7,66.83 270 top
R50  100k  [R0603]  147.8,66.2 0 top
R51  2k  [R0603]  131.13,65.72 0 top
R52  100k  [R0603]  147.8,63.98 180 top
R53  10k  [R0603]  131.13,63.66 0 top
R54  196R  [R0603]  114.78,61.59 180 top
R55  681R  [R0603]  118.59,61.59 180 top
R56  316R  [R0603]  147.8,61.59 180 top
R57  100k  [R0603]  114.78,59.05 0 top
R58  464R  [R0603]  122.4,59.05 180 top
R59  100k  [R0603]  114.78,56.52 180 top
R60  464R  [R0603]  122.4,56.52 180 top
R61  1k  [R0603]  58.42,55.72 180 top
R62  10k  [R0603]  13.18,55.24 180 top
R63  196R  [R0603]  114.78,53.98 180 top
R64  681R  [R0603]  118.59,53.98 180 top
R65  196R  [R0603]  45.09,53.34 0 top
R66  316R  [R0603]  147.8,53.34 180 top
R67  10k  [R0603]  13.18,53.18 0 top
R68  2k  [R0603]  24.77,52.55 90 top
R69  5k  [R0603]  131.13,52.55 180 top
R70  10k  [R0603]  13.18,51.12 180 top
R71  196R  [R0603]  45.09,51.12 0 top
R72  100k  [R0603]  147.8,50.96 0 top
R73  2k  [R0603]  131.13,50.48 0 top
R74  10k  [R0603]  13.18,49.05 0 top
R75  2k  [R0603]  24.77,48.9 90 top
R76  196R  [R0603]  45.09,48.9 0 top
R77  100k  [R0603]  147.8,48.74 180 top
R78  10k  [R0603]  131.13,48.42 0 top
R79  10k  [R0603]  13.18,46.99 0 top
R80  196R  [R0603]  114.78,46.35 180 top
R81  681R  [R0603]  118.59,46.35 180 top
R82  316R  [R0603]  147.8,46.35 180 top
R83  10k  [R0603]  49.69,46.28 0 top
R84  10k  [R0603]  13.18,44.93 0 top
R85  4k3  [R0603]  63.5,44.93 0 top
R86  100k  [R0603]  39.37,43.81 180 top
R87  100k  [R0603]  114.78,43.81 0 top
R88  464R  [R0603]  122.4,43.81 180 top
R89  10k  [R0603]  13.18,42.86 0 top
R90  10k  [R0603]  53.66,41.43 90 top
R91  100k  [R0603]  114.78,41.27 180 top
R92  464R  [R0603]  122.4,41.27 180 top
R93  10k  [R0603]  13.18,40.8 0 top
R94  10k  [R0603]  13.18,38.73 0 top
R95  196R  [R0603]  114.78,38.73 180 top
R96  681R  [R0603]  118.59,38.73 180 top
R97  10k  [R0603]  41.75,38.1 0 top
R98  316R  [R0603]  147.8,38.1 180 top
R99  5k  [R0603]  131.13,37.31 180 top
R100  10k  [R0603]  78.74,35.88 180 top
R101  100k  [R0603]  147.8,35.72 0 top
R102  2k  [R0603]  131.13,35.24 0 top
R103  1k  [R0603]  49.53,34.77 0 top
R104  100k  [R0603]  53.34,34.77 0 top
R105  681R  [R0603]  44.29,33.66 90 top
R106  10k  [R0603]  46.35,33.66 270 top
R107  100k  [R0603]  147.8,33.5 180 top
R108  40k2  [R0603]  18.89,33.34 180 top
R109  10k  [R0603]  131.13,33.18 0 top
R110  90k9  [R0603]  18.89,31.27 0 top
R111  196R  [R0603]  114.78,31.11 180 top
R112  681R  [R0603]  118.59,31.11 180 top
R113  316R  [R0603]  147.8,31.11 180 top
R114  2k2  [R0603]  46.99,29.53 270 top
R115  100k  [R0603]  114.78,28.57 0 top
R116  464R  [R0603]  122.4,28.57 180 top
R117  1M  [R0603]  18.89,27.15 0 top
R118  DNP  [R0603]  24.45,26.67 0 top
R119  2k2  [R0603]  46.99,25.72 90 top
R120  100k  [R0603]  114.78,26.04 180 top
R121  464R  [R0603]  122.4,26.04 180 top
R122  196R  [R0603]  114.78,23.5 180 top
R123  681R  [R0603]  118.59,23.5 180 top
R124  316R  [R0603]  147.8,22.86 180 top
R125  5k  [R0603]  131.13,22.07 180 top
R126  100k  [R0603]  147.8,20.48 0 top
R127  2k  [R0603]  131.13,20 0 top
R128  100k  [R0603]  147.8,18.26 180 top
R129  10k  [R0603]  131.13,17.94 0 top
R130  22k  [R0603]  13.81,16.35 0 top
R131  174k  [R0603]  16.99,16.19 90 top
R132  196R  [R0603]  114.78,15.88 180 top
R133  681R  [R0603]  118.59,15.88 180 top
R134  316R  [R0603]  147.8,15.88 180 top
R135  174k  [R0603]  35.24,15.56 90 top
R136  100k  [R0603]  114.78,13.34 0 top
R137  464R  [R0603]  122.4,13.34 180 top
R138  40k2  [R0603]  35.24,11.49 90 top
R139  100k  [R0603]  114.78,10.79 180 top
R140  464R  [R0603]  122.4,10.79 180 top
R141  267k  [R0603]  13.18,8.81 90 top
R142  196R  [R0603]  114.78,8.26 180 top
R143  681R  [R0603]  118.59,8.26 180 top
R144  316R  [R0603]  147.8,7.62 180 top
R145  5k  [R0603]  131.13,6.83 180 top
R146  100k  [R0603]  147.8,5.24 0 top
R147  2k  [R0603]  131.13,4.76 0 top
R148  84k5  [R0603]  13.18,4.13 270 top
R149  84k5  [R0603]  35.24,4.07 90 top
R150  10k  [R0603]  131.13,2.7 0 top
RN1  33R  [741-8]  61.59,84.2 270 top
RN2  33R  [741-8]  82.23,75.25 180 top
RN3  33R  [741-8]  71.44,72.07 270 top
RN4  33R  [741-8]  85.72,51.8 270 top
RN5  33R  [741-8]  82.87,49.8 270 top
RN6  33R  [741-8]  85.72,47.79 270 top
SJ1  DNP  [SJ_2]  41.91,93.66 90 top
SJ2  DNP  [SJ_2]  45.72,93.66 270 top
TP1  DNP  [B1,27]  66.99,98.11 0 top
TP2  DNP  [B1,27]  66.99,95.56 0 top
TP3  DNP  [B1,27]  66.99,93.03 0 top
TP4  DNP  [B1,27]  66.99,90.65 0 top
TP5  DNP  [B1,27]  66.99,88.27 0 top
U1  OPA1612AID  [SOIC8]  25.88,91.12 180 top
U2  OPA1612AID  [SOIC8]  133.19,88.27 180 top
U3  CS5381  [TSSOP-24]  48.9,86.04 90 top
U4  SI53365  [TSSOP16]  81.28,81.6 180 top
U5  CS4398  [TSSOP-28]  100.17,80.64 270 top
U6  OPA1612AID  [SOIC8]  25.88,79.38 180 top
U7  OPA1612AID  [SOIC8]  133.19,73.03 180 top
U8  OPA1612AID  [SOIC8]  133.19,57.78 180 top
U9  CS4398  [TSSOP-28]  100.17,50.16 270 top
U10  OPA1612AID  [SOIC8]  133.19,42.55 180 top
U11  OPA1612AID  [SOIC8]  133.19,27.3 180 top
U12  CS4398  [TSSOP-28]  100.17,19.68 270 top
U13  OPA1612AID  [SOIC8]  133.19,12.06 180 top
U14  MC7805AC2T  [TO263-2]  64.93,10.79 180 top
U15  LM1084ISX-3.3  [TO263-3]  81.28,10.79 180 top
U16  LMZ35003RKGR  [B1QFN-41]  20.8,7.94 90 top
U17  LMZ34002RKGR  [B1QFN-41']  42.86,7.94 90 top
U$2  [10MMDSPCORE]  81.28,64.14 0 top
X1  43045-0612  [43045-0612]  6,85.09 90 top
X2  43045-0612  [43045-0612]  154,85.09 270 top
X3  43045-0612  [43045-0612]  154,71.12 270 top
X4  43045-0612  [43045-0612]  154,57.15 270 top
X5  43045-0612  [43045-0612]  154,43.18 270 top
X6  WERI 61400416121  [USB-B-H]  12.76,29.5 0 top
X7  43045-0612  [43045-0612]  154,29.21 270 top
X8  B02P-NV  [B02P-NV]  6.03,14.92 270 top
X9  43045-0612  [43045-0612]  154,15.24 270 top
Y1  DNP  [CRYSTAL-SMD-7X5]  78.74,93.34 180 top
Y2  24.576MHz  [CRYSTAL-SMD-9X14]  78.74,93.34 180 top
Y3  24MHz  [3.2X2.5MM]  24.45,40.96 180 top

## Library data of the parts
C1-C214 L1-L19 R1-R150 = rcl
D1-D3 = SparkFun-LED; PROD_ID: DIO-00821
D4 = fio-audio-EagleLibrary_Wuerth_Elektronik
D5 = diode
H1-H4 = holes
IC1 IC4 IC5 = fio-audio-analog-devices
IC2 IC6 = microchip
IC3 = cypress; MF: CYPRESS SEMICONDUCTOR CORPORAT; MPN: CY7C68013A-56PVXC; OC_FARNELL: unknown; OC_NEWARK: unknown
JP1 JP2 X6 = SparkFun-Connectors
JP4 = fio-audio-pinhead
Q1 Q3 Q5 Q9 Q12 Q14 Q16 = transistor-pnp
Q2 Q4 Q6 Q10 Q13 Q15 Q17 = transistor-npn
Q7 = fio-audio-pnp
Q8 Q11 = transistor
RN1-RN6 = resistor-array
SJ1 SJ2 = jumper
TP1-TP5 = testpad
U1 U2 U6-U8 U10 U11 U13 = fio-audio-ti
U3 U5 U9 U12 = fio-audio-cirrus
U4 = fio-audio-silabs
U14 U15 = fio-audio-power
U16 = ti_buck; DATASHEETURL: http://www.ti.com/product/lmz35003; FREQUENCY: 1000000.0; IMAX: 2.5; MANUFACTURER_NAME: Texas Instruments; MANUFACTURER_PART_NUMBER: LMZ35003RKGR; MKTG_PACKAGE: R-PB1QFN-N41; NSID: LMZ35003RKGR; PACKAGE: R-PB1QFN-N41; VENDOR: Texas Instruments
U17 = ti_inverted_buck; COMPTYPE: IC; MANUFACTURER: Texas Instruments; MANUFACTURER_NAME: Texas Instruments; MANUFACTURER_PART_NUMBER: LMZ34002RKGR; MOUNTTYPE: SMT; PACKAGEREFERENCE: RKG0041A; PARTNUMBER: LMZ34002RKG; PIN_COUNT: 41; REFDES: RefDes; ROHS: Y; TYPE: TYPE
U$2 = fio-audio-logo
X1-X5 X7 X9 = con-molex-micro-fit-3_0
X8 = fio-audio-JST
Y1 Y2 = fio-audio-crystek
Y3 = fio-audio-abracon

## Nets
5VA: C162.+ L6.1 L8.1 L14.1 L18.1 L19.1 TP3.TP U14.3
5VA_MUTE: L19.2 Q3.2 Q5.2 Q9.2 Q12.2 Q14.2 Q16.2
!DISABLE: Q2.C X2.P$6 X3.P$6 X4.P$6 X5.P$6 X7.P$6 X9.P$6
!RESET: IC1.24 IC4.2 R104.2 U3.1 U5.13 U9.13 U12.13
!SS: IC1.33 IC3.35 R97.1
!SS_M: IC1.26 IC2.1 R90.1
!USB_RESET: R103.1 R105.2 R106.1
+7V5A [8V]: C13.2 C33.1 C50.2 C68.1 C77.+ C99.1 C143.1 C163.+ C173.1 C179.1 C180.1 C186.1 C188.1 C194.1 C198.1 C205.1 C207.1 JP1.14 JP2.14 R135.2 R148.2 TP1.TP U1.8 U2.8 U6.8 U7.8 U8.8 U10.8 U11.8 U13.8 U14.1 U15.3 U16.10 U16.11 U16.12 U16.13 U16.14 U16.15 U16.39 U17.26
-7V5A [8V]: C7.1 C16.2 C42.1 C62.2 C76.- C78.- C87.2 C123.2 C160.2 C179.2 C181.1 C189.1 C197.2 C199.1 C208.1 R5.1 R33.1 R53.1 R78.1 R109.1 R129.1 R138.1 R150.1 TP2.TP U1.4 U2.4 U6.4 U7.4 U8.4 U10.4 U11.4 U13.4 U17.1 U17.4 U17.5 U17.8 U17.9 U17.16 U17.17 U17.18 U17.19 U17.20 U17.29 U17.30 U17.32 U17.33 U17.34 U17.37 U17.40
AMUTEC_DAC_00: Q15.C X7.P$4
AMUTEC_DAC_01: Q10.C X4.P$4
AMUTEC_DAC_02: Q4.C X2.P$4
AUXADC0: IC1.8 R13.1 U3.15
AUXADC1: IC1.9 JP2.5 R79.1
AUXADC2: IC1.10 JP2.7 R84.1
AUXADC3: IC1.11 JP2.9 R89.1
AUXADC4: IC1.12 JP2.11 R93.1
AUXADC5: IC1.13 JP2.13 R94.1
BCLK0: IC1.57 RN1.7
BCLK1: IC1.60 RN3.7
BCLK2: IC1.65
BCLK3: IC1.68
BCLK_OUT0: RN6.7 U12.4
BCLK_OUT1: RN5.6 U9.4
BCLK_OUT2: RN4.7 U5.4
BMUTEC_DAC_00: Q17.C X9.P$4
BMUTEC_DAC_01: Q13.C X5.P$4
BMUTEC_DAC_02: Q6.C X3.P$4
D_N: D4.4 IC3.9 X6.D-
D_P: D4.3 IC3.8 X6.D+
DAC_00_AOUT+: R120.2 R122.2 U12.23
DAC_00_AOUT-: R111.2 R115.1 U12.24
DAC_00_BOUT+: R132.2 R136.1 U12.20
DAC_00_BOUT-: R139.2 R142.2 U12.19
DAC_01_AOUT+: R59.2 R63.2 U9.23
DAC_01_AOUT-: R54.2 R57.1 U9.24
DAC_01_BOUT+: R80.2 R87.1 U9.20
DAC_01_BOUT-: R91.2 R95.2 U9.19
DAC_02_AOUT+: R20.2 R22.2 U5.23
DAC_02_AOUT-: R9.2 R14.1 U5.24
DAC_02_BOUT+: R37.2 R41.1 U5.20
DAC_02_BOUT-: R43.2 R45.2 U5.19
DGND: C1.2 C2.2 C5.1 C6.2 C7.2 C8.2 C11.2 C12.1 C13.1 C15.1 C16.1 C17.1 C18.2 C19.1 C20.2 C21.2 C22.2 C23.2 C24.2 C25.- C28.1 C29.1 C30.1 C31.1 C32.1 C33.2 C34.1 C35.1 C36.1 C39.2 C42.2 C43.1 C44.1 C45.- C46.1 C47.1 C48.2 C49.2 C50.1 C52.1 C53.2 C54.2 C59.2 C60.- C61.1 C62.1 C63.2 C64.2 C65.2 C66.1 C67.1 C68.2 C69.1 C70.- C71.- C74.2 C75.1 C76.+ C77.- C78.+ C80.2 C81.2 C84.1 C85.1 C86.1 C87.1 C88.2 C89.2 C90.2 C91.1 C92.- C93.1 C94.2 C95.1 C96.1 C97.1 C98.1 C99.2 C100.1 C101.1 C102.1 C103.1 C104.2 C105.1 C108.1 C109.1 C110.1 C111.1 C112.- C113.1 C116.2 C117.2 C120.1 C121.1 C122.1 C123.1 C124.2 C125.2 C126.2 C127.2 C128.2 C129.2 C130.2 C131.1 C132.1 C133.1 C134.2 C135.1 C136.1 C137.1 C138.1 C139.1 C140.1 C141.1 C142.1 C143.2 C144.1 C145.- C146.- C147.1 C148.2 C149.2 C152.2 C153.2 C154.2 C157.2 C158.1 C159.1 C160.1 C161.1 C162.- C163.- C164.- C165.2 C166.2 C167.2 C168.- C169.1 C170.1 C171.1 C172.1 C173.2 C174.1 C175.1 C176.2 C180.2 C181.2 C182.1 C183.1 C184.- C185.2 C186.2 C187.1 C188.2 C189.2 C190.2 C191.2 C194.2 C195.1 C196.2 C197.1 C198.2 C199.2 C200.2 C201.2 C202.2 C203.1 C204.1 C205.2 C206.1 C207.2 C208.2 C209.- C210.- C213.2 C214.2 D1.C D4.2 D5.A IC1.1 IC1.6 IC1.14 IC1.17 IC1.19 IC1.25 IC1.36 IC1.37 IC1.54 IC1.55 IC1.72 IC1.P$1 IC1.P$2 IC1.P$3 IC1.P$4 IC1.P$5 IC1.P$6 IC1.P$7 IC1.P$8 IC1.P$9 IC1.P$10 IC1.P$11 IC1.P$12 IC1.P$13 IC1.P$14 IC1.P$15 IC1.P$16 IC1.P$17 IC1.P$18 IC1.P$19 IC1.P$20 IC1.P$21 IC1.P$22 IC1.P$23 IC1.P$24 IC1.P$25 IC1.P$26 IC1.P$27 IC1.P$28 IC1.P$29 IC1.P$30 IC1.P$31 IC1.P$32 IC1.P$33 IC1.P$34 IC1.P$35 IC1.P$36 IC1.P$37 IC1.P$38 IC1.P$39 IC1.P$40 IC1.P$41 IC1.P$42 IC1.P$43 IC1.P$44 IC1.P$45 IC1.P$46 IC1.P$47 IC1.P$48 IC1.P$49 IC1.P$50 IC2.4 IC3.6 IC3.10 IC3.12 IC3.14 IC3.26 IC3.28 IC3.41 IC3.44 IC3.53 IC3.56 IC3.EPAD IC3.P$1 IC3.P$2 IC3.P$3 IC3.P$4 IC3.P$5 IC3.P$6 IC3.P$7 IC3.P$8 IC3.P$9 IC3.P$10 IC3.P$11 IC3.P$12 IC3.P$13 IC3.P$14 IC3.P$15 IC3.P$16 IC3.P$17 IC3.P$18 IC3.P$19 IC3.P$20 IC3.P$21 IC3.P$22 IC3.P$23 IC3.P$24 IC3.P$25 IC4.1 IC5.1 IC6.2 IC6.3 IC6.4 IC6.7 JP1.1 JP1.3 JP1.5 JP1.7 JP1.9 JP1.11 JP2.6 JP2.8 JP4.2 Q2.E Q4.E Q6.E Q8.E Q10.E Q11.E Q13.E Q15.E Q17.E R1.1 R4.1 R6.1 R14.2 R16.2 R20.1 R25.1 R27.2 R28.2 R32.1 R35.1 R41.2 R43.1 R48.1 R50.2 R52.1 R57.2 R59.1 R69.1 R72.2 R77.1 R86.1 R87.2 R91.1 R99.1 R101.2 R104.1 R107.1 R110.1 R115.2 R117.2 R120.1 R125.1 R126.2 R128.1 R130.1 R136.2 R139.1 R141.1 R145.1 R146.2 R149.1 RN4.4 RN4.5 RN5.1 RN5.8 RN6.4 RN6.5 SJ1.3 SJ2.1 TP5.TP U3.7 U3.11 U3.12 U3.18 U3.23 U4.4 U4.7 U4.12 U5.1 U5.2 U5.8 U5.11 U5.12 U5.16 U5.21 U5.28 U9.1 U9.2 U9.8 U9.11 U9.12 U9.16 U9.21 U9.28 U12.1 U12.2 U12.8 U12.11 U12.12 U12.16 U12.21 U12.28 U14.2 U15.1 U16.1 U16.4 U16.5 U16.8 U16.9 U16.16 U16.17 U16.18 U16.19 U16.20 U16.29 U16.30 U16.32 U16.33 U16.34 U16.37 U16.40 U17.10 U17.11 U17.12 U17.13 U17.14 U17.15 U17.39 X1.P$2 X1.P$5 X2.P$3 X2.P$5 X3.P$3 X3.P$5 X4.P$3 X4.P$5 X5.P$3 X5.P$5 X6.GND X7.P$3 X7.P$5 X8.2 X9.P$3 X9.P$5 Y1.2 Y2.2 Y3.2 Y3.4
DVDD: C80.1 C85.2 C93.2 C102.2 C103.2 C104.1 C131.2 C132.2 C140.2 C142.2 C148.1 C149.1 IC1.20 IC1.35 IC1.53 IC1.71 Q7.2
IOVDD: C8.1 C12.2 C15.2 C20.1 C74.1 C75.2 C81.1 C86.2 C91.2 C94.1 C101.2 C108.2 C121.2 C124.1 C128.1 C129.1 C133.2 C134.1 C135.2 C147.2 C152.1 C153.1 C154.1 C157.1 C158.2 C161.2 C164.+ C176.1 IC1.2 IC1.7 IC1.18 IC1.38 IC1.56 IC2.7 IC2.8 IC3.3 IC3.7 IC3.11 IC3.17 IC3.27 IC3.32 IC3.43 IC3.55 IC4.4 IC6.1 IC6.8 JP1.13 JP2.10 JP2.12 L1.1 L2.1 L3.1 L4.2 L5.2 L7.2 L9.1 L10.2 L11.2 L12.2 L13.1 L15.2 L16.2 L17.2 Q1.2 R65.2 R67.2 R71.2 R74.2 R76.2 R79.2 R83.2 R84.2 R89.2 R90.2 R93.2 R94.2 R97.2 R100.1 R106.2 R114.2 R118.2 R119.2 TP4.TP U15.2 U15.4
LOW_NO_SELFBOOT: IC1.34 R100.2
LRCLK0: IC1.58 RN1.6
LRCLK1: IC1.61 RN3.6
LRCLK_OUT0: RN6.6 U12.5
LRCLK_OUT1: RN5.5 U9.5
LRCLK_OUT2: RN4.6 U5.5
MCLK_ADC: RN1.8 U4.8
MCLK_DAC0: C182.2 RN2.6 U12.6
MCLK_DAC1: C110.2 RN2.7 U9.6
MCLK_DAC2: C43.2 RN2.8 U5.6
MCLK_DSP: C141.2 IC1.21 RN2.5
MCLK_I2S: RN3.8 U4.9
MISO: IC1.30 IC3.34
MISO_M: IC1.29 IC2.2
MOSI: IC1.32 IC3.33
MOSI_M: IC1.27 IC2.5
MP6: C105.2 IC1.45 R62.1
MP6_ROTARY: JP2.1 R62.2 R67.1
MP7: C109.2 IC1.46 R70.1
MP7_ROTARY: JP2.3 R70.2 R74.1
MP9: IC1.50 Q1.1 R1.2
MP12: IC1.66 R75.1
MP12_LED: D3.C JP2.4 Q11.C
MP13: IC1.69 R68.1
MP13_LED: D2.C JP2.2 Q8.C
N$1: JP1.2 RN3.1
N$2: IC1.5 R49.1
N$3: R148.1 U16.36
N$4: C130.1 R82.1 X5.P$1
N$5: C84.2 L9.2 Q7.3 R61.1
N$6: IC1.3 Q7.1 R61.2
N$7: JP1.4 RN3.2
N$8: C114.2 R85.1
N$9: C115.2 IC1.16 R85.2
N$10: Q14.1 R125.2 U12.25
N$11: C195.2 C209.+ U12.15
N$12: C122.2 C145.+ U9.15
N$13: C3.1 R8.1 U1.1
N$14: C200.1 R132.1 R133.2
N$15: C192.2 R133.1 R137.2
N$16: C27.1 R12.1 U1.7
N$17: C203.2 R142.1 R143.2
N$18: C211.1 R140.2 R143.1
N$19: C14.1 R3.2 R8.2 U3.16
N$20: R141.2 U16.31
N$21: C165.1 R111.1 R112.2
N$22: R130.2 R131.1 U16.27
N$23: C196.1 U16.28
N$24: C90.1 R56.1 X4.P$2
N$25: C92.+ U9.26
N$26: C65.1 R39.1 X3.P$1
N$27: C23.1 R11.1 X2.P$2
N$28: R135.1 R138.2 U17.27
N$29: D3.A R76.1
N$30: Q16.1 R145.2 U12.18
N$31: R149.2 U17.36
N$32: C168.+ U12.26
N$33: C61.2 C70.+ U5.15
N$34: C25.+ U5.26
N$35: C155.2 R112.1 R116.2
N$36: C97.2 L10.1 U9.7
N$37: C201.1 R137.1 U13.3
N$38: C204.2 R140.1 U13.5
N$39: C211.2 C212.+ U13.6 U13.7
N$40: C192.1 C193.+ U13.1 U13.2
N$41: C212.- R144.2 R146.1
N$42: C206.2 R144.1 X9.P$2
N$43: C14.2 R12.2 R18.2 U3.17
N$44: C169.2 R122.1 R123.2
N$45: C193.- R128.2 R134.2
N$46: C202.1 R134.1 X9.P$1
N$47: C177.1 R121.2 R123.1
N$48: C166.1 R116.1 U11.3
N$49: C170.2 R121.1 U11.5
N$50: C177.2 C178.+ U11.6 U11.7
N$51: C155.1 C156.+ U11.1 U11.2
N$52: C178.- R124.2 R126.1
N$53: C174.2 R124.1 X7.P$1
N$54: C156.- R107.2 R113.2
N$55: C167.1 R113.1 X7.P$2
N$56: C3.2 R3.1 U1.2
N$57: C126.1 R80.1 R81.2
N$58: C118.2 R81.1 R88.2
N$59: Q12.1 R99.2 U9.18
N$60: C137.2 R95.1 R96.2
N$61: C150.1 R92.2 R96.1
N$62: C127.1 R88.1 U10.3
N$63: C138.2 R92.1 U10.5
N$64: C150.2 C151.+ U10.6 U10.7
N$65: C118.1 C119.+ U10.1 U10.2
N$66: C151.- R98.2 R101.1
N$67: C144.2 R98.1 X5.P$2
N$68: C119.- R77.2 R82.2
N$69: Q9.1 R69.2 U9.25
N$70: C27.2 R18.1 U1.6
N$71: C88.1 R54.1 R55.2
N$72: C82.2 R55.1 R58.2
N$73: Q3.1 R25.2 U5.25
N$74: C95.2 R63.1 R64.2
N$75: C106.1 R60.2 R64.1
N$76: C89.1 R58.1 U8.3
N$77: C96.2 R60.1 U8.5
N$78: C106.2 C107.+ U8.6 U8.7
N$79: C82.1 C83.+ U8.1 U8.2
N$80: C107.- R66.2 R72.1
N$81: C100.2 R66.1 X4.P$1
N$82: C83.- R52.2 R56.2
N$83: Q5.1 R48.2 U5.18
N$84: C26.+ R17.1 U1.5
N$85: C63.1 R37.1 R38.2
N$86: C55.2 R38.1 R42.2
N$87: C4.+ R7.2 U1.3
N$88: C66.2 R45.1 R46.2
N$89: C72.1 R44.2 R46.1
N$90: C64.1 R42.1 U7.3
N$91: C67.2 R44.1 U7.5
N$92: C72.2 C73.+ U7.6 U7.7
N$93: C55.1 C56.+ U7.1 U7.2
N$94: C73.- R47.2 R50.1
N$95: C69.2 R47.1 X3.P$2
N$96: C56.- R32.2 R39.2
N$97: Q3.3 R30.1 R33.2
N$98: IC1.44 RN5.2
N$99: C21.1 R9.1 R10.2
N$100: C9.2 R10.1 R15.2
N$101: Q1.3 R2.1 R5.2
N$102: C28.2 R22.1 R23.2
N$103: C37.1 R21.2 R23.1
N$104: C22.1 R15.1 U2.3
N$105: C29.2 R21.1 U2.5
N$106: C37.2 C38.+ U2.6 U2.7
N$107: C9.1 C10.+ U2.1 U2.2
N$108: C38.- R24.2 R27.1
N$109: C34.2 R24.1 X2.P$1
N$110: C10.- R4.2 R11.2
N$111: Q16.3 R147.1 R150.2
N$112: C171.2 L15.1 U12.7
N$113: C58.1 R34.1 U6.7
N$114: C40.2 R31.1 U6.1
N$115: C51.2 R34.2 R40.2 U3.21
N$116: C51.1 R26.2 R31.2 U3.20
N$117: C58.2 R40.1 U6.6
N$118: C40.1 R26.1 U6.2
N$119: Q14.3 R127.1 R129.2
N$120: C41.+ R29.1 U6.3
N$121: C57.+ R36.2 U6.5
N$122: C57.- R35.2 X1.P$3
N$123: C41.- R28.1 X1.P$6
N$124: IC1.48 RN4.2
N$125: IC1.49 RN4.1
N$126: Q12.3 R102.1 R109.2
N$127: Q9.3 R73.1 R78.2
N$128: C48.1 C60.+ U3.24
N$129: Q8.B R68.2
N$130: Q5.3 R51.1 R53.2
N$131: Q4.B R30.2
N$132: Q6.B R51.2
N$133: IC4.3 R103.2
N$134: IC2.3 R83.1
N$135: Q10.B R73.2
N$136: Q13.B R102.2
N$137: Q15.B R127.2
N$138: Q17.B R147.2
N$139: Q2.B R2.2
N$140: IC1.47 RN4.3
N$141: C32.2 RN1.1 U3.5
N$142: C26.- R16.1 X1.P$4
N$143: IC1.43 RN5.3
N$144: C4.- R6.2 X1.P$1
N$145: R19.2 Y1.3 Y2.3
N$146: IC1.42 RN5.4
N$147: IC1.39 RN6.3
N$148: IC1.40 RN6.2
N$149: IC1.41 RN6.1
N$150: RN1.2 U3.4
N$151: RN1.3 U3.3
N$152: RN1.4 U3.9
N$153: R19.1 U4.1
N$154: C11.1 C19.2 C39.1 C49.1 C59.1 L1.2 U4.5 U4.10 U4.14 Y1.4 Y2.4
N$155: U4.3
N$156: RN2.1 U4.16
N$157: C79.2 JP1.12
N$158: RN2.3 U4.13
N$159: RN2.2 U4.15
N$160: U4.6
N$161: Q11.B R75.2
N$162: JP1.6 RN3.3
N$163: JP1.8 RN3.4
N$164: RN2.4 U4.11
N$165: C175.2 R117.1 X6.S1 X6.S2
N$166: D2.A R71.1
N$167: D1.A R65.1
N$168: C139.2 IC3.5 Y3.3
N$169: SJ1.2 U3.14
N$170 [isolate mount]: C214.1 H4.B3,2
N$171: IC3.18 R105.1
N$172: C159.2 IC5.4 R108.1 R110.2 R118.1
N$173: D4.5 R108.2 X6.VBUS
N$174: C125.1 IC3.4 Y3.1
N$175: IC1.52
N$176: IC1.51
N$177 [isolate mount]: C1.1 H1.B3,2
N$178 [isolate mount]: C2.1 H2.B3,2
N$179 [isolate mount]: C213.1 H3.B3,2
N$180: C136.2 IC3.42 IC5.2 R86.2
N$181: SJ2.2 U3.13
PH: U16.6 U16.7 U16.21 U16.22 U16.23 U16.24 U16.38 U16.41
PH2: U17.6 U17.7 U17.21 U17.22 U17.23 U17.24 U17.38 U17.41
PVDD: C114.1 C115.1 C116.1 C120.2 IC1.15 L13.2
SCL: IC3.15 IC6.6 JP4.1 R119.1
SCLK: IC1.31 IC3.40
SCLK_M: IC1.28 IC2.6
SDA: IC3.16 IC6.5 JP4.3 R114.1
SDATA_IN0: IC1.59 RN1.5
SDATA_IN1: IC1.62 RN3.5
SDATA_IN2: IC1.67
SDATA_IN3: IC1.70
SDATA_OUT0: RN6.8 U12.3
SDATA_OUT1: RN5.7 U9.3
SDATA_OUT2: RN4.8 U5.3
SPDIF_IN: C79.1 IC1.4
SPDIF_OUT: JP1.10 R49.2
VA00: C183.2 C184.+ C191.1 C210.+ L18.2 U12.17 U12.22
VA01: C111.2 C112.+ C117.1 C146.+ L14.2 U9.17 U9.22
VA02: C44.2 C45.+ C54.1 C71.+ L8.2 U5.17 U5.22
VA03: C35.2 C36.2 L6.2 U3.19
VA04: C17.2 C18.1 L3.2 U3.6
VA05: C5.2 C6.1 L2.2 R13.2 SJ1.1 SJ2.3 U3.2 U3.8 U3.10
VD02: C30.2 L4.1 U5.7
VIN: C185.1 C190.1 D5.C R131.2 U16.26 X8.1
VLC00: C187.2 L17.1 U12.9 U12.10 U12.14
VLC01: C113.2 L12.1 U9.9 U9.10 U9.14
VLC02: C52.2 L7.1 U5.9 U5.10 U5.14
VLS00: C172.2 L16.1 U12.27
VLS01: C98.2 L11.1 U9.27
VLS02: C31.2 L5.1 U5.27
VQ: C24.1 C46.2 C47.2 C53.1 R7.1 R17.2 R29.2 R36.1 U3.22